# Altium PCB baicuoiki.PcbDoc (part 1 of 2)
Units mm, origin at the board's own origin, x right, y up, seen from the top; angles counter-clockwise.
Board outline 178.82 x 125.98 mm, 2 copper layers (Top Layer, Bottom Layer); 261 components, 166 nets, 718 pads, 50 vias.
Unrouted connection lines stored in the file: 3.
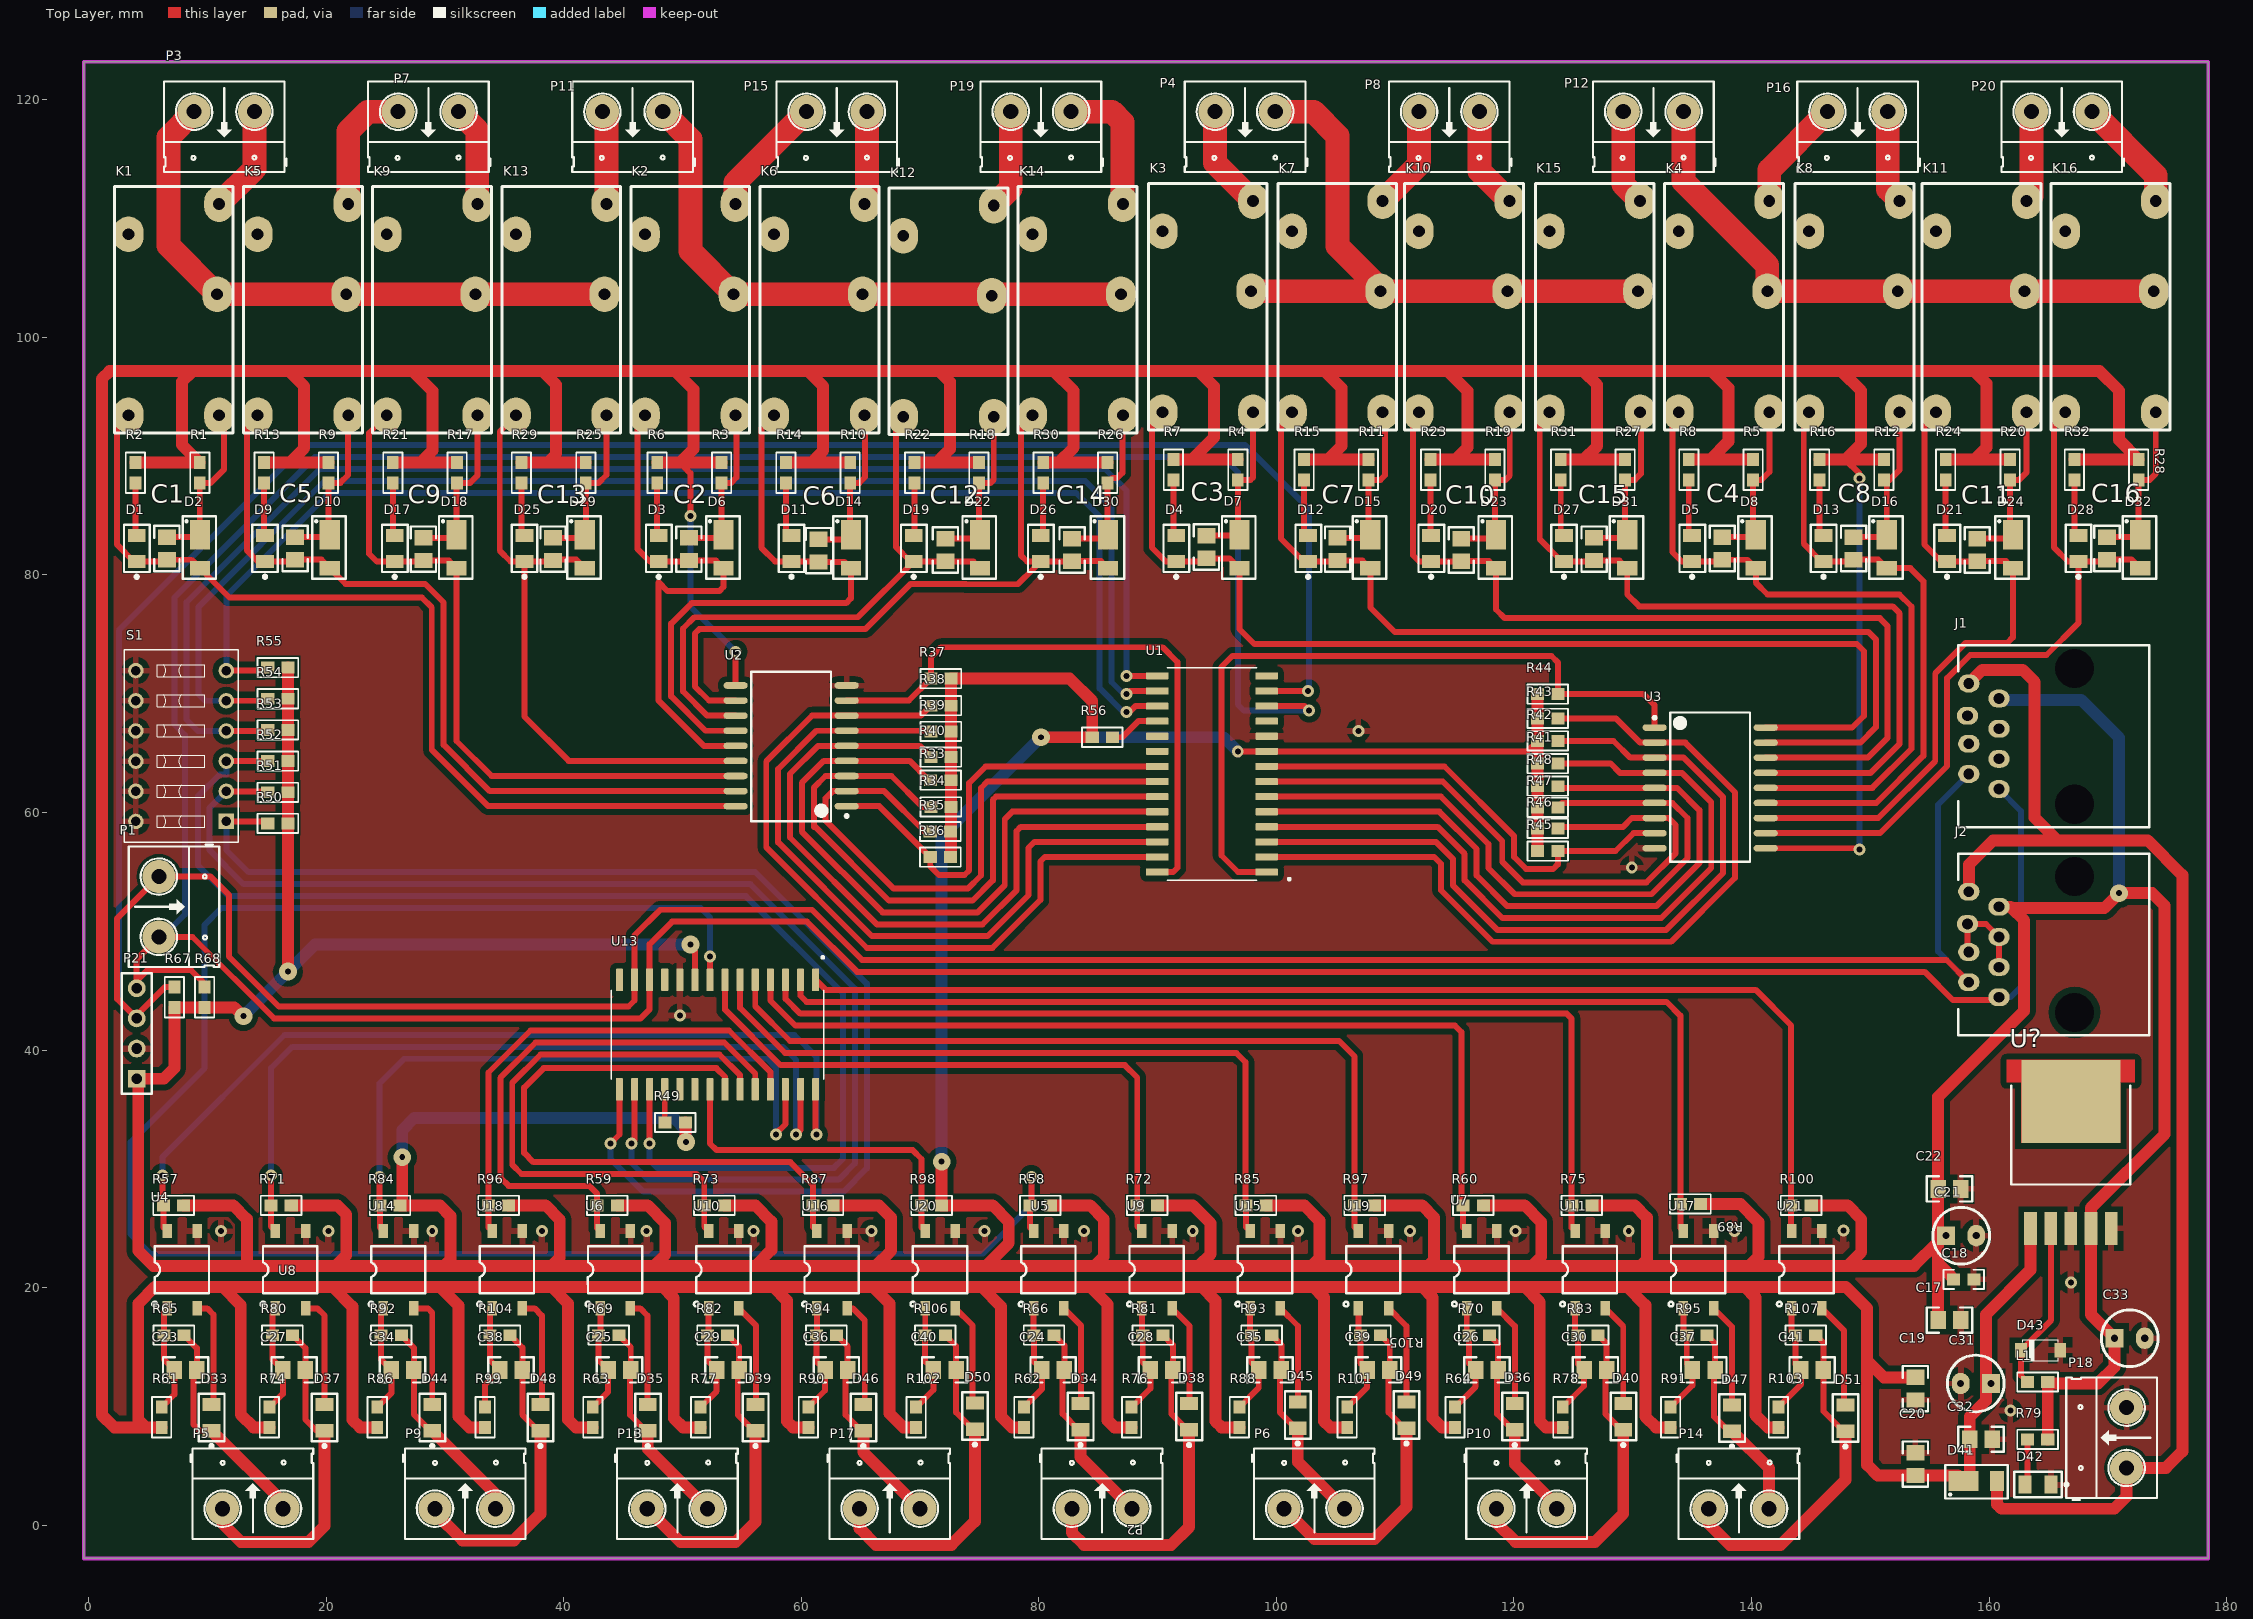
[diagram p0: Top Layer view]
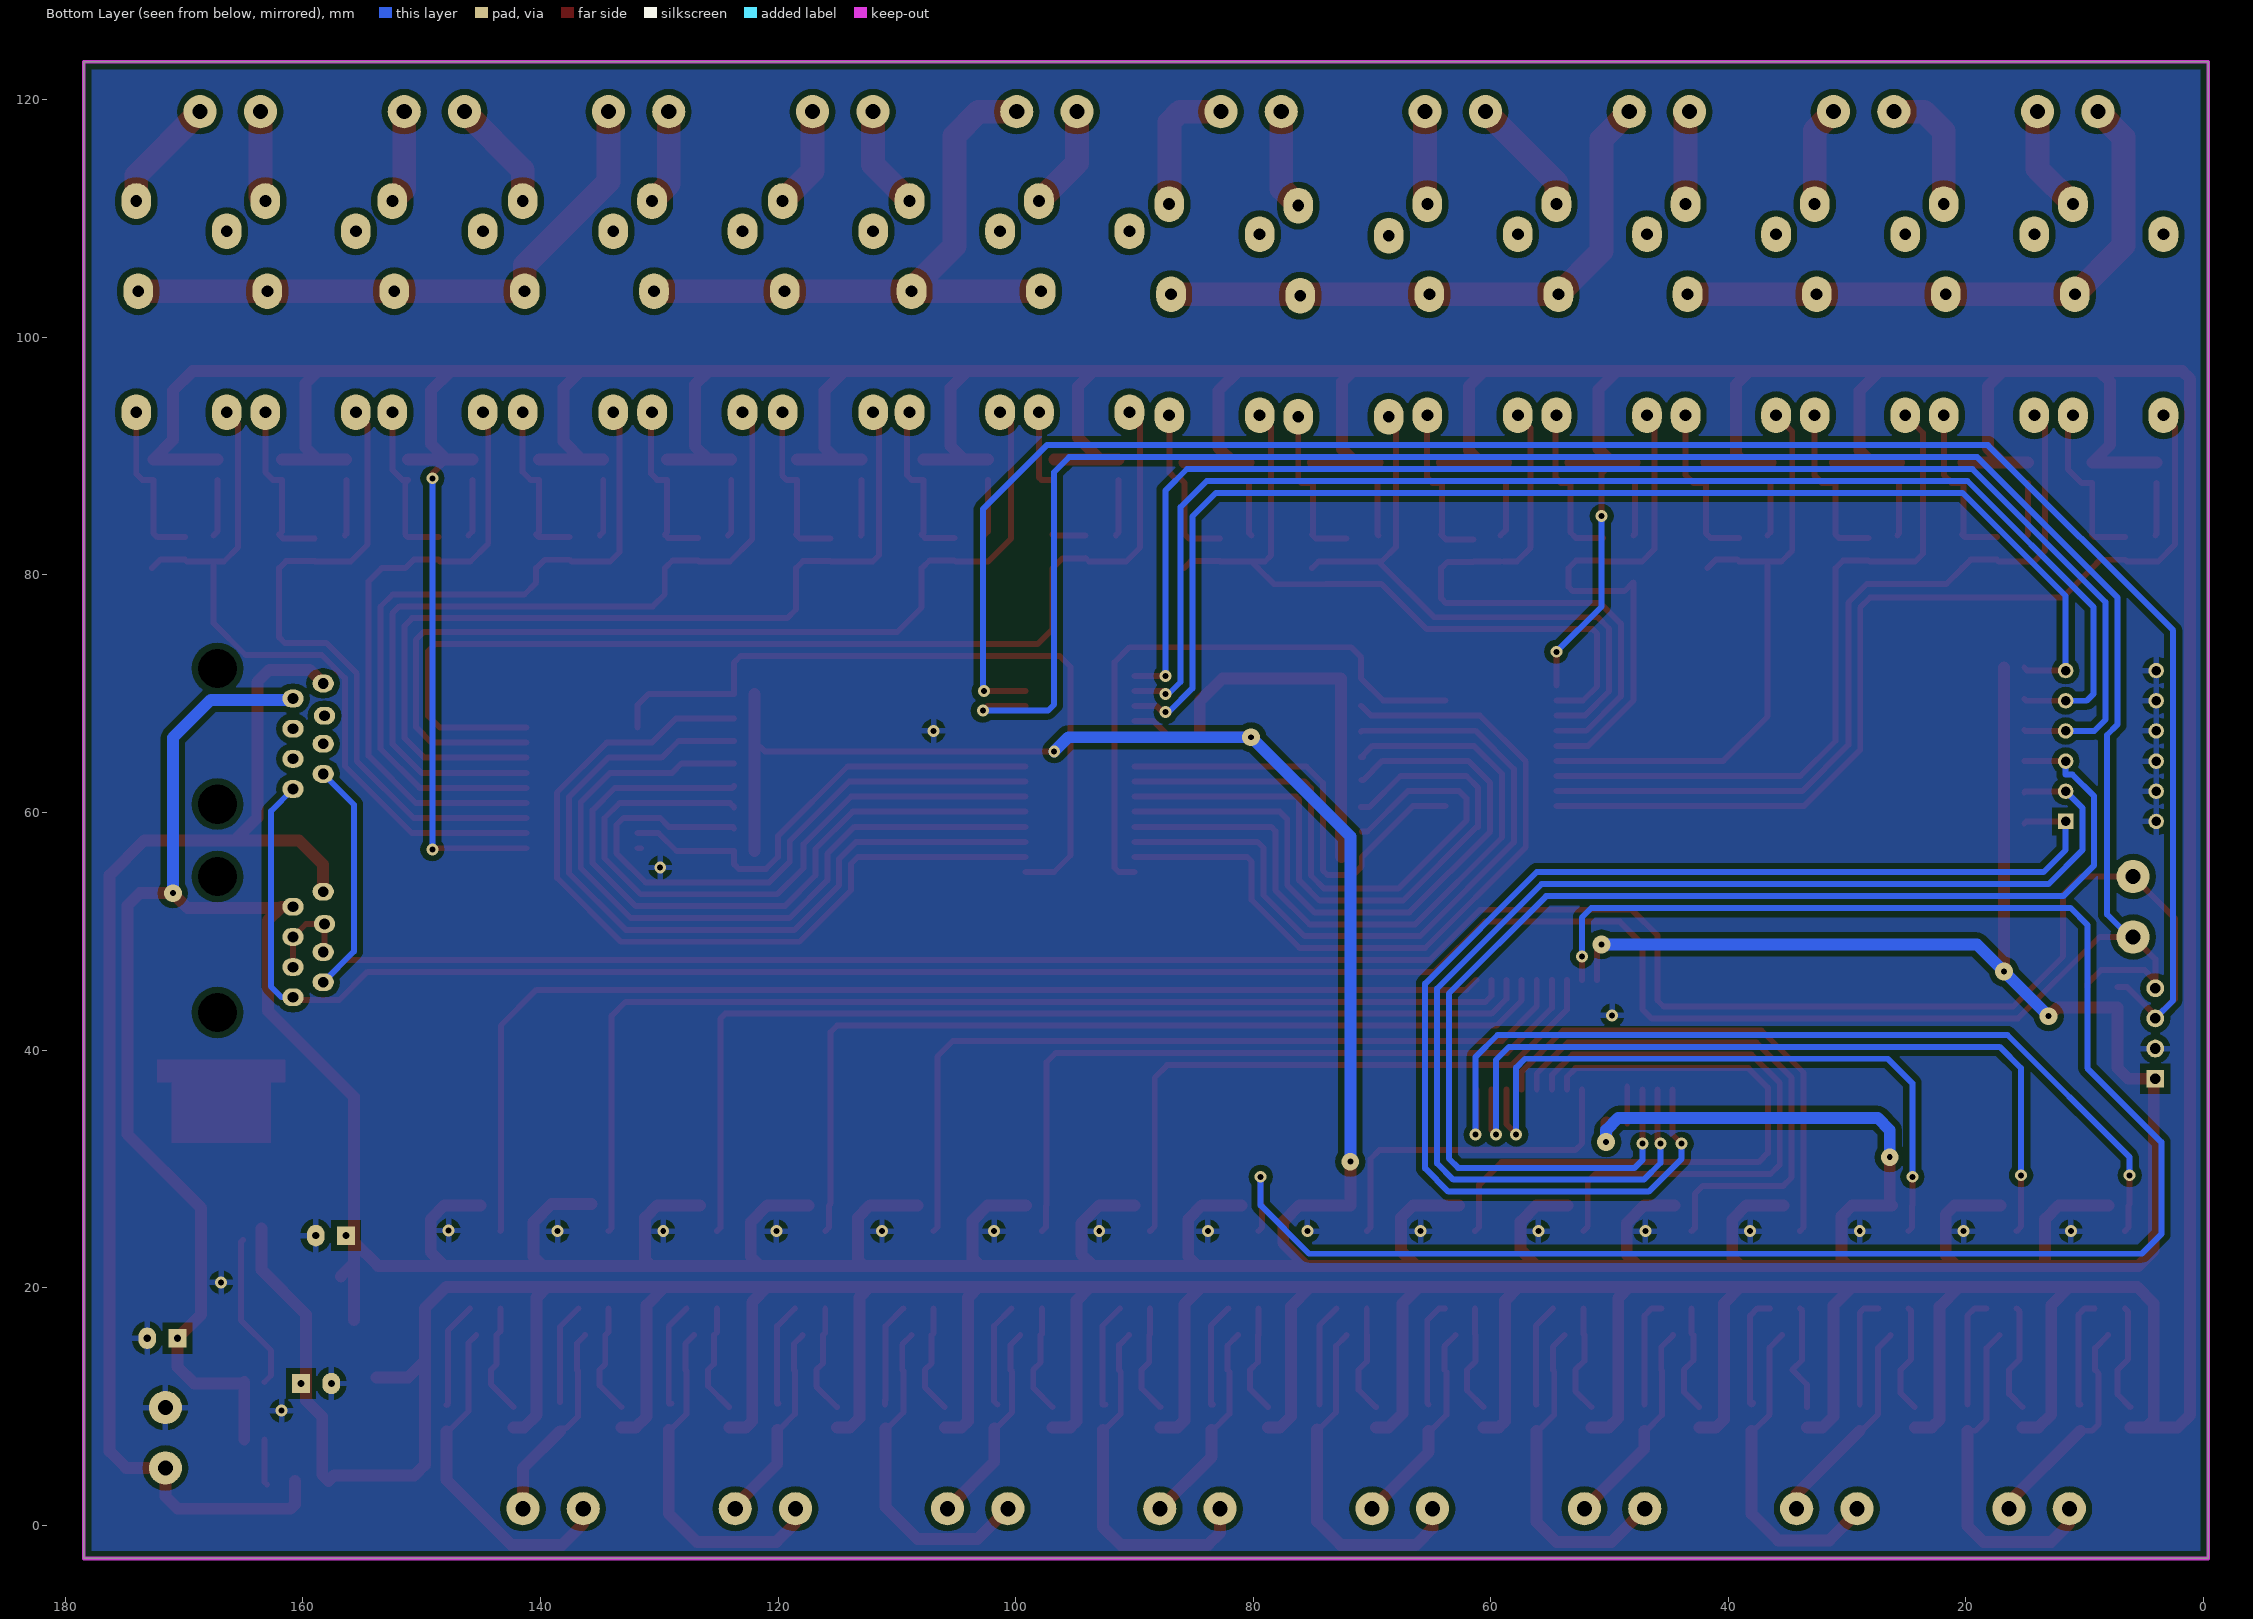
[diagram p1: Bottom Layer view, seen from below]
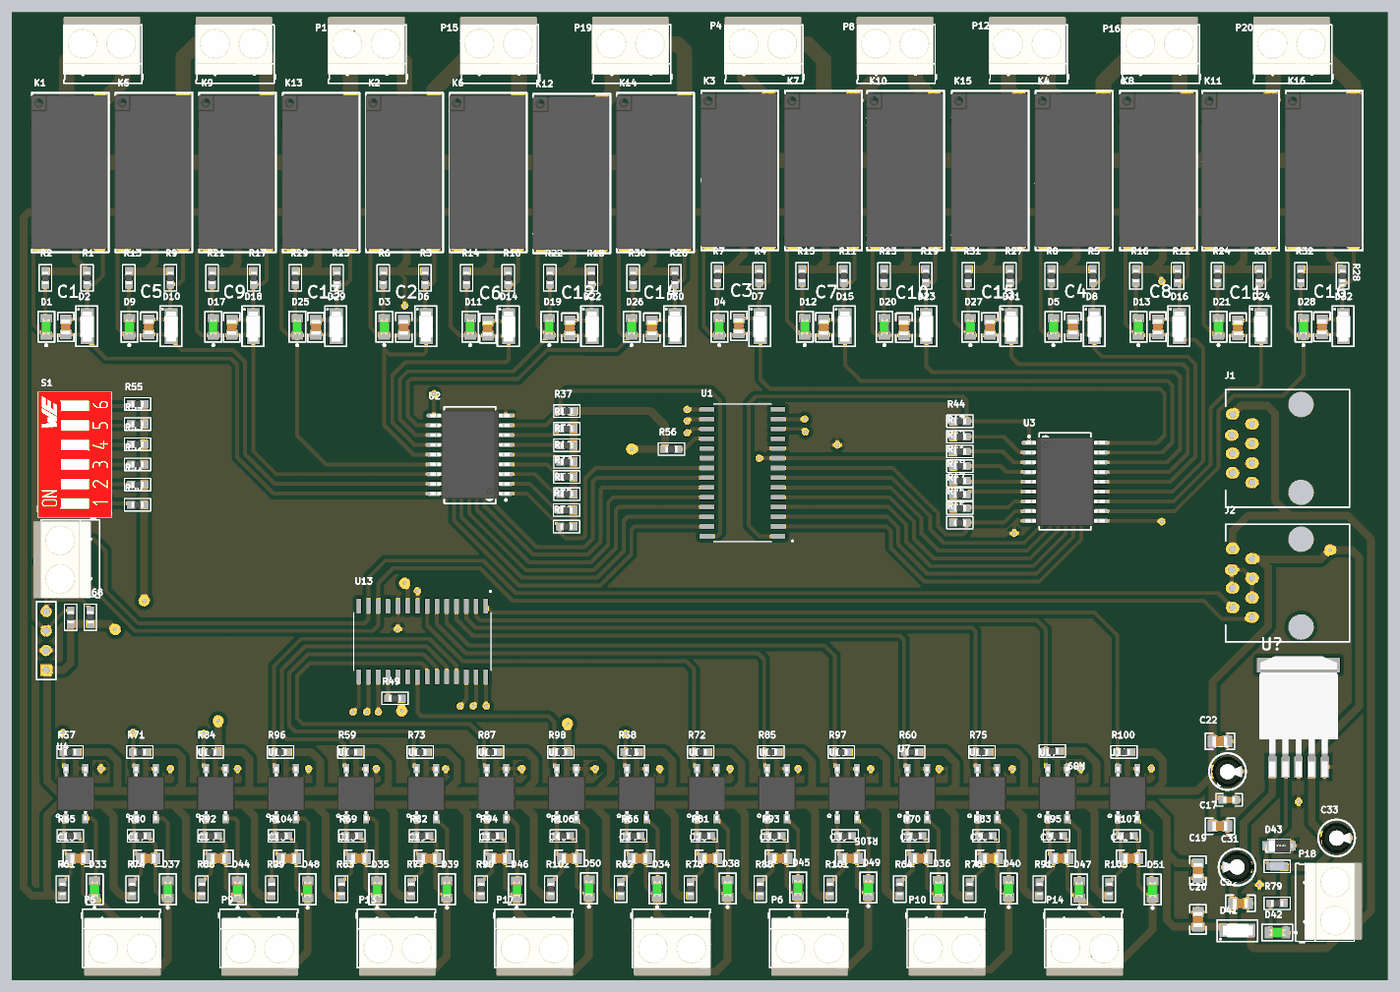
[diagram p3: 3D render of the assembled board from above, using the file's embedded part models]

## Layer stack, top to bottom
Top Solder: solder mask 0.0102, Solder Resist, Dk 3.5
Top Layer: signal copper 0.0356
Dielectric 1: dielectric 0.32, FR-4, Dk 4.8
Bottom Layer: signal copper 0.0356
Bottom Solder: solder mask 0.0102, Solder Resist, Dk 3.5

## Board outline
-0.381,-2.794 -0.381,123.19 178.435,123.19 178.435,-2.794

## Design rules (kind name [scope] priority, off if disabled: settings)
Clearance [All] p1: gap=0.5 ignorepadtopadclearanceinfootprint=FALSE
PolygonConnect [All] p1: connectstyle=Relief reliefconductorwidth=0.5 reliefentries=4 polygonreliefangle="90 Angle" airgapwidth=0.5
RoutingVias [All] p1: holewidth=0.5 width=1 viastyle="Through Hole" minholewidth=0.5 minwidth=1 maxholewidth=0.5 maxwidth=1
SolderMaskExpansion [All] p1: expansion=0.102
Width [All] p1: maxlimit=2 minlimit=0.5 preferedwidth=1
30 further rules are at their usual default settings.

## Components (designator, comment, footprint, x,y, rotation, side; value= is the part's Value field where it differs from the comment)
C1 "225/10V" "CAPC-0805 (2012)" 6.604,82.23 r90 top
C2 "225/10V" "CAPC-0805 (2012)" 50.546,82.169 r90 top
C3 "225/10V" "CAPC-0805 (2012)" 94.107,82.362 r90 top
C4 "225/10V" "CAPC-0805 (2012)" 137.541,82.23 r90 top
C5 "225/10V" "CAPC-0805 (2012)" 17.399,82.235 r90 top
C6 "225/10V" "CAPC-0805 (2012)" 61.468,82.042 r90 top
C7 "225/10V" "CAPC-0805 (2012)" 105.16,82.169 r90 top
C8 "225/10V" "CAPC-0805 (2012)" 148.59,82.235 r90 top
C9 "225/10V" "CAPC-0805 (2012)" 28.194,82.169 r90 top
C10 "225/10V" "CAPC-0805 (2012)" 115.57,82.108 r90 top
C11 "225/10V" "CAPC-0805 (2012)" 159.004,82.108 r90 top
C12 "225/10V" "CAPC-0805 (2012)" 72.136,82.108 r90 top
C13 "225/10V" "CAPC-0805 (2012)" 39.116,82.169 r90 top
C14 "225/10V" "CAPC-0805 (2012)" 82.804,82.108 r90 top
C15 "225/10V" "CAPC-0805 (2012)" 126.746,82.169 r90 top
C16 "225/10V" "CAPC-0805 (2012)" 169.926,82.235 r90 top
C17 "225/10V" "CAPC-0805 (2012)" 156.657,17.272 r0 top
C18 "Cap Pol 3mm" "CAPC-0603 (1608)" 157.861,20.701 r0 top
C19 "225/10V" "CAPC-0805 (2012)" 153.797,11.496 r270 top
C20 "225/10V" "CAPC-0805 (2012)" 153.797,5.141 r90 top
C21 "Cap Pol 3mm" C3MM 157.646,24.384 r0 top
C22 "225/10V" "CAPC-0805 (2012)" 156.657,28.321 r0 top
C23 "225/10V" "CAPC-0805 (2012)" 8.183,13.081 r180 top
C24 "225/10V" "CAPC-0805 (2012)" 81.213,13.081 r180 top
C25 "225/10V" "CAPC-0805 (2012)" 44.703,13.081 r180 top
C26 "225/10V" "CAPC-0805 (2012)" 117.723,13.081 r180 top
C27 "225/10V" "CAPC-0805 (2012)" 17.321,13.081 r180 top
C28 "225/10V" "CAPC-0805 (2012)" 90.341,13.081 r180 top
C29 "225/10V" "CAPC-0805 (2012)" 53.831,13.081 r180 top
C30 "225/10V" "CAPC-0805 (2012)" 126.851,13.081 r180 top
C31 "Cap Pol 3mm" C3MM 158.877,11.938 r180 top
C32 "225/10V" "CAPC-0805 (2012)" 159.324,7.239 r180 top
C33 "Cap Pol 3mm" C3MM 171.831,15.748 r0 top
C34 "225/10V" "CAPC-0805 (2012)" 26.448,13.081 r180 top
C35 "225/10V" "CAPC-0805 (2012)" 99.468,13.081 r180 top
C36 "225/10V" "CAPC-0805 (2012)" 62.958,13.081 r180 top
C37 "225/10V" "CAPC-0805 (2012)" 135.979,13.081 r180 top
C38 "225/10V" "CAPC-0805 (2012)" 35.576,13.081 r180 top
C39 "225/10V" "CAPC-0805 (2012)" 108.596,13.081 r180 top
C40 "225/10V" "CAPC-0805 (2012)" 72.086,13.081 r180 top
C41 "225/10V" "CAPC-0805 (2012)" 145.106,13.081 r180 top
D1 "2V4/20mA" LED_0805_GREEN 4.064,82.235 r270 top
D2 "30V/1A" DIODE_DFLS130L 9.398,81.983 r90 top
D3 "2V4/20mA" LED_0805_GREEN 48.006,82.235 r270 top
D4 "2V4/20mA" LED_0805_GREEN 91.567,82.235 r270 top
D5 "2V4/20mA" LED_0805_GREEN 135.001,82.235 r270 top
D6 "30V/1A" DIODE_DFLS130L 53.467,81.983 r90 top
D7 "30V/1A" DIODE_DFLS130L 96.901,81.983 r90 top
D8 "30V/1A" DIODE_DFLS130L 140.36,81.983 r90 top
D9 "2V4/20mA" LED_0805_GREEN 14.859,82.235 r270 top
D10 "30V/1A" DIODE_DFLS130L 20.32,81.983 r90 top
D11 "2V4/20mA" LED_0805_GREEN 59.182,82.235 r270 top
D12 "2V4/20mA" LED_0805_GREEN 102.675,82.235 r270 top
D13 "2V4/20mA" LED_0805_GREEN 146.056,82.235 r270 top
D14 "30V/1A" DIODE_DFLS130L 64.186,81.983 r90 top
D15 "30V/1A" DIODE_DFLS130L 107.908,81.983 r90 top
D16 "30V/1A" DIODE_DFLS130L 151.384,81.983 r90 top
D17 "2V4/20mA" LED_0805_GREEN 25.781,82.235 r270 top
D18 "30V/1A" DIODE_DFLS130L 30.988,81.983 r90 top
D19 "2V4/20mA" LED_0805_GREEN 69.469,82.235 r270 top
D20 "2V4/20mA" LED_0805_GREEN 113.03,82.235 r270 top
D21 "2V4/20mA" LED_0805_GREEN 156.464,82.235 r270 top
D22 "30V/1A" DIODE_DFLS130L 75.057,81.983 r90 top
D23 "30V/1A" DIODE_DFLS130L 118.491,81.983 r90 top
D24 "30V/1A" DIODE_DFLS130L 162.001,81.983 r90 top
D25 "2V4/20mA" LED_0805_GREEN 36.703,82.235 r270 top
D26 "2V4/20mA" LED_0805_GREEN 80.162,82.235 r270 top
D27 "2V4/20mA" LED_0805_GREEN 124.206,82.235 r270 top
D28 "2V4/20mA" LED_0805_GREEN 167.513,82.235 r270 top
D29 "30V/1A" DIODE_DFLS130L 41.783,81.983 r90 top
D30 "30V/1A" DIODE_DFLS130L 85.834,81.983 r90 top
D31 "30V/1A" DIODE_DFLS130L 129.54,81.983 r90 top
D32 "30V/1A" DIODE_DFLS130L 172.72,81.983 r90 top
D33 "2V4/20mA" LED_0805_GREEN 10.359,9.06 r270 top
D34 "2V4/20mA" LED_0805_GREEN 83.511,9.144 r270 top
D35 "2V4/20mA" LED_0805_GREEN 47.086,9.06 r270 top
D36 "2V4/20mA" LED_0805_GREEN 120.073,9.144 r270 top
D37 "2V4/20mA" LED_0805_GREEN 19.869,9.06 r270 top
D38 "2V4/20mA" LED_0805_GREEN 92.655,9.144 r270 top
D39 "2V4/20mA" LED_0805_GREEN 56.159,9.06 r270 top
D40 "2V4/20mA" LED_0805_GREEN 129.201,9.144 r270 top
D41 "30V/1A" DIODE_DFLS130L 159.258,3.734 r180 top
D42 "2V4/20mA" LED_0805_GREEN 164.127,3.429 r0 top
D43 "3.6V" SOD-123 164.337,14.732 r90 top
D44 "2V4/20mA" LED_0805_GREEN 28.941,9.06 r270 top
D45 "2V4/20mA" LED_0805_GREEN 101.799,9.271 r270 top
D46 "2V4/20mA" LED_0805_GREEN 65.231,9.06 r270 top
D47 "2V4/20mA" LED_0805_GREEN 138.355,9.017 r270 top
D48 "2V4/20mA" LED_0805_GREEN 38.045,9.06 r270 top
D49 "2V4/20mA" LED_0805_GREEN 110.946,9.271 r270 top
D50 "2V4/20mA" LED_0805_GREEN 74.621,9.187 r270 top
D51 "2V4/20mA" LED_0805_GREEN 147.9,9.017 r270 top
J1 "RJ45-5524-8C" RJ45_5224-8C 162.687,66.421 r90 top
J2 "RJ45-5524-8C" RJ45_5224-8C 162.687,48.895 r90 top
K1 "RELAY" RELAY 3.38,93.441 r0 top
K2 "RELAY" RELAY 46.854,93.441 r0 top
K3 "RELAY" RELAY 90.422,93.695 r0 top
K4 "RELAY" RELAY 133.877,93.695 r0 top
K5 "RELAY" RELAY 14.249,93.441 r0 top
K6 "RELAY" RELAY 57.723,93.441 r0 top
K7 "RELAY" RELAY 101.31,93.695 r0 top
K8 "RELAY" RELAY 144.852,93.695 r0 top
K9 "RELAY" RELAY 25.117,93.441 r0 top
K10 "RELAY" RELAY 111.992,93.695 r0 top
K11 "RELAY" RELAY 155.54,93.695 r0 top
K12 "RELAY" RELAY 68.592,93.314 r0 top
K13 "RELAY" RELAY 35.986,93.441 r0 top
K14 "RELAY" RELAY 79.46,93.441 r0 top
K15 "RELAY" RELAY 122.988,93.695 r0 top
K16 "RELAY" RELAY 166.409,93.695 r0 top
L1 "47nH/0.3A" "IND-0603 (1608)" 164.084,12.065 r0 top
P1 "Header 2x1" HED2 5.93,54.61 r270 top
P2 "Header 2x1" HED2 82.786,1.397 r0 top
P3 "Header 2x1" HED2 13.97,118.999 r180 top
P4 "Header 2x1" HED2 99.907,118.999 r180 top
P5 "Header 2x1" HED2 11.303,1.397 r0 top
P6 "Header 2x1" HED2 100.657,1.397 r0 top
P7 "Header 2x1" HED2 31.157,118.999 r180 top
P8 "Header 2x1" HED2 117.094,118.999 r180 top
P9 "Header 2x1" HED2 29.174,1.397 r0 top
P10 "Header 2x1" HED2 118.527,1.397 r0 top
P11 "Header 2x1" HED2 48.345,118.999 r180 top
P12 "Header 2x1" HED2 134.281,118.999 r180 top
P13 "Header 2x1" HED2 47.044,1.397 r0 top
P14 "Header 2x1" HED2 136.398,1.397 r0 top
P15 "Header 2x1" HED2 65.532,118.999 r180 top
P16 "Header 2x1" HED2 151.469,118.999 r180 top
P17 "Header 2x1" HED2 64.915,1.397 r0 top
P18 "Header 2x1" HED2 171.577,4.826 r90 top
P19 "Header 2x1" HED2 82.719,118.999 r180 top
P20 "Header 2x1" HED2 168.656,118.999 r180 top
P21 "Header 4P" HDR1X4 4.064,37.592 r90 top
R1 "10k" "RESC-0603 (1608)" 9.373,88.607 r90 top value=13K
R2 "10k" "RESC-0603 (1608)" 3.957,88.607 r90 top value=13K
R3 "10k" "RESC-0603 (1608)" 53.295,88.607 r90 top value=13K
R4 "10k" "RESC-0603 (1608)" 96.754,88.861 r90 top value=13K
R5 "10k" "RESC-0603 (1608)" 140.134,88.861 r90 top value=13K
R6 "10k" "RESC-0603 (1608)" 47.879,88.607 r90 top value=13K
R7 "10k" "RESC-0603 (1608)" 91.338,88.861 r90 top value=13K
R8 "10k" "RESC-0603 (1608)" 134.718,88.861 r90 top value=13K
R9 "10k" "RESC-0603 (1608)" 20.205,88.607 r90 top value=13K
R10 "10k" "RESC-0603 (1608)" 64.127,88.607 r90 top value=13K
R11 "10k" "RESC-0603 (1608)" 107.751,88.861 r90 top value=13K
R12 "10k" "RESC-0603 (1608)" 151.146,88.861 r90 top value=13K
R13 "10k" "RESC-0603 (1608)" 14.789,88.607 r90 top value=13K
R14 "10k" "RESC-0603 (1608)" 58.711,88.607 r90 top value=13K
R15 "10k" "RESC-0603 (1608)" 102.335,88.861 r90 top value=13K
R16 "10k" "RESC-0603 (1608)" 145.73,88.861 r90 top value=13K
R17 "10k" "RESC-0603 (1608)" 31.037,88.607 r90 top value=13K
R18 "10k" "RESC-0603 (1608)" 74.959,88.607 r90 top value=13K
R19 "10k" "RESC-0603 (1608)" 118.397,88.861 r90 top value=13K
R20 "10k" "RESC-0603 (1608)" 161.761,88.861 r90 top value=13K
R21 "10k" "RESC-0603 (1608)" 25.621,88.607 r90 top value=13K
R22 "10k" "RESC-0603 (1608)" 69.543,88.607 r90 top value=13K
R23 "10k" "RESC-0603 (1608)" 112.981,88.861 r90 top value=13K
R24 "10k" "RESC-0603 (1608)" 156.345,88.861 r90 top value=13K
R25 "10k" "RESC-0603 (1608)" 41.869,88.607 r90 top value=13K
R26 "10k" "RESC-0603 (1608)" 85.791,88.607 r90 top value=13K
R27 "10k" "RESC-0603 (1608)" 129.356,88.861 r90 top value=13K
R28 "10k" "RESC-0603 (1608)" 172.593,88.861 r90 top value=13K
R29 "10k" "RESC-0603 (1608)" 36.453,88.607 r90 top value=13K
R30 "10k" "RESC-0603 (1608)" 80.375,88.607 r90 top value=13K
R31 "10k" "RESC-0603 (1608)" 123.94,88.861 r90 top value=13K
R32 "10k" "RESC-0603 (1608)" 167.177,88.861 r90 top value=13K
R33 "10k" "RESC-0603 (1608)" 71.749,62.722 r180 top value=13K
R34 "10k" "RESC-0603 (1608)" 71.761,60.483 r180 top value=13K
R35 "10k" "RESC-0603 (1608)" 71.714,58.404 r180 top value=13K
R36 "10k" "RESC-0603 (1608)" 71.714,56.245 r180 top value=13K
R37 "10k" "RESC-0603 (1608)" 71.761,71.278 r180 top value=13K
R38 "10k" "RESC-0603 (1608)" 71.761,68.992 r180 top value=13K
R39 "10k" "RESC-0603 (1608)" 71.761,66.833 r180 top value=13K
R40 "10k" "RESC-0603 (1608)" 71.761,64.674 r180 top value=13K
R41 "10k" "RESC-0603 (1608)" 122.846,64.123 r0 top value=13K
R42 "10k" "RESC-0603 (1608)" 122.846,66.028 r0 top value=13K
R43 "10k" "RESC-0603 (1608)" 122.846,67.933 r0 top value=13K
R44 "10k" "RESC-0603 (1608)" 122.846,69.965 r0 top value=13K
R45 "10k" "RESC-0603 (1608)" 122.846,56.757 r0 top value=13K
R46 "10k" "RESC-0603 (1608)" 122.846,58.662 r0 top value=13K
R47 "10k" "RESC-0603 (1608)" 122.846,60.44 r0 top value=13K
R48 "10k" "RESC-0603 (1608)" 122.846,62.218 r0 top value=13K
R49 "10k" "RESC-0603 (1608)" 49.403,33.909 r180 top value=13K
R50 "10k" "RESC-0603 (1608)" 15.948,59.081 r180 top value=13K
R51 "10k" "RESC-0603 (1608)" 15.948,61.706 r180 top value=13K
R52 "10k" "RESC-0603 (1608)" 15.948,64.33 r180 top value=13K
R53 "10k" "RESC-0603 (1608)" 15.948,66.955 r180 top value=13K
R54 "10k" "RESC-0603 (1608)" 15.948,69.58 r180 top value=13K
R55 "10k" "RESC-0603 (1608)" 15.948,72.204 r180 top value=13K
R56 "10k" "RESC-0603 (1608)" 85.35,66.338 r0 top value=13K
R57 "4.7K" "RESC-0603 (1608)" 7.168,26.924 r180 top value=13K
R58 "4.7K" "RESC-0603 (1608)" 80.121,26.924 r180 top value=13K
R59 "4.7K" "RESC-0603 (1608)" 43.672,26.924 r180 top value=13K
R60 "4.7K" "RESC-0603 (1608)" 116.57,26.924 r180 top value=13K
R61 "2.2k" "RESC-0603 (1608)" 6.168,9.092 r270 top value=13K
R62 "2.2k" "RESC-0603 (1608)" 78.748,9.092 r270 top value=13K
R63 "2.2k" "RESC-0603 (1608)" 42.458,9.092 r270 top value=13K
R64 "2.2k" "RESC-0603 (1608)" 115.038,9.092 r270 top value=13K
R65 "10k" "RESC-0603 (1608)" 7.196,16.002 r0 top value=13K
R66 "10k" "RESC-0603 (1608)" 80.443,16.002 r0 top value=13K
R67 "1k" "RESC-0603 (1608)" 7.239,44.45 r90 top value=13K
R68 "1k" "RESC-0603 (1608)" 9.779,44.45 r90 top value=13K
R69 "10k" "RESC-0603 (1608)" 43.806,16.002 r0 top value=13K
R70 "10k" "RESC-0603 (1608)" 117.081,16.002 r0 top value=13K
R71 "4.7K" "RESC-0603 (1608)" 16.222,26.924 r180 top value=13K
R72 "4.7K" "RESC-0603 (1608)" 89.138,26.924 r180 top value=13K
R73 "4.7K" "RESC-0603 (1608)" 52.689,26.924 r180 top value=13K
R74 "2.2k" "RESC-0603 (1608)" 15.241,9.092 r270 top value=13K
R75 "4.7K" "RESC-0603 (1608)" 125.714,26.924 r180 top value=13K
R76 "2.2k" "RESC-0603 (1608)" 87.821,9.092 r270 top value=13K
R77 "2.2k" "RESC-0603 (1608)" 51.531,9.092 r270 top value=13K
R78 "2.2k" "RESC-0603 (1608)" 124.111,9.092 r270 top value=13K
R79 "2.2K" "RESC-0603 (1608)" 164.084,7.239 r0 top value=13K
R80 "10k" "RESC-0603 (1608)" 16.327,16.002 r0 top value=13K
R81 "10k" "RESC-0603 (1608)" 89.603,16.002 r0 top value=13K
R82 "10k" "RESC-0603 (1608)" 52.965,16.002 r0 top value=13K
R83 "10k" "RESC-0603 (1608)" 126.24,16.002 r0 top value=13K
R84 "4.7K" "RESC-0603 (1608)" 25.384,26.924 r180 top value=13K
R85 "4.7K" "RESC-0603 (1608)" 98.282,26.924 r180 top value=13K
R86 "2.2k" "RESC-0603 (1608)" 24.313,9.092 r270 top value=13K
R87 "4.7K" "RESC-0603 (1608)" 61.833,26.924 r180 top value=13K
R88 "2.2k" "RESC-0603 (1608)" 96.893,9.092 r270 top value=13K
R89 "4.7K" "RESC-0603 (1608)" 134.858,27.051 r180 top value=13K
R90 "2.2k" "RESC-0603 (1608)" 60.603,9.092 r270 top value=13K
R91 "2.2k" "RESC-0603 (1608)" 133.183,9.092 r270 top value=13K
R92 "10k" "RESC-0603 (1608)" 25.487,16.002 r0 top value=13K
R93 "10k" "RESC-0603 (1608)" 98.762,16.002 r0 top value=13K
R94 "10k" "RESC-0603 (1608)" 62.124,16.002 r0 top value=13K
R95 "10k" "RESC-0603 (1608)" 135.4,16.002 r0 top value=13K
R96 "4.7K" "RESC-0603 (1608)" 34.528,26.924 r180 top value=13K
R97 "4.7K" "RESC-0603 (1608)" 107.426,26.924 r180 top value=13K
R98 "4.7K" "RESC-0603 (1608)" 70.977,26.924 r180 top value=13K
R99 "2.2k" "RESC-0603 (1608)" 33.386,9.092 r270 top value=13K
R100 "4.7K" "RESC-0603 (1608)" 144.178,26.924 r180 top value=13K
R101 "2.2k" "RESC-0603 (1608)" 105.966,9.092 r270 top value=13K
R102 "2.2k" "RESC-0603 (1608)" 69.676,9.092 r270 top value=13K
R103 "2.2k" "RESC-0603 (1608)" 142.256,9.092 r270 top value=13K
R104 "10k" "RESC-0603 (1608)" 34.646,16.002 r0 top value=13K
R105 "10k" "RESC-0603 (1608)" 107.921,16.002 r0 top value=13K
R106 "10k" "RESC-0603 (1608)" 71.284,16.002 r0 top value=13K
R107 "10k" "RESC-0603 (1608)" 144.559,16.002 r0 top value=13K
S1 "=partNo" SW-DIP6 7.798,65.6 r90 top
U1 "MCP23017-E/SO" SOIC127P1030X265-28N 94.582,63.246 r180 top
U2 "ULN2803A" SO18 59.156,65.616 r180 top
U3 "ULN2803A" SO18 136.52,62.076 r0 top
U4 "VOM617A-2T" "OPTO TRANSISTOR_SOP-4" 7.893,21.518 r90 top
U5 "VOM617A-2T" "OPTO TRANSISTOR_SOP-4" 80.83,21.518 r90 top
U6 "VOM617A-2T" "OPTO TRANSISTOR_SOP-4" 44.361,21.518 r90 top
U7 "VOM617A-2T" "OPTO TRANSISTOR_SOP-4" 117.298,21.518 r90 top
U8 "VOM617A-2T" "OPTO TRANSISTOR_SOP-4" 17.01,21.518 r90 top
U9 "VOM617A-2T" "OPTO TRANSISTOR_SOP-4" 89.947,21.518 r90 top
U10 "VOM617A-2T" "OPTO TRANSISTOR_SOP-4" 53.478,21.518 r90 top
U11 "VOM617A-2T" "OPTO TRANSISTOR_SOP-4" 126.415,21.518 r90 top
U13 "MCP23017-E/SO" SOIC127P1030X265-28N 52.959,41.308 r270 top
U14 "VOM617A-2T" "OPTO TRANSISTOR_SOP-4" 26.109,21.518 r90 top
U15 "VOM617A-2T" "OPTO TRANSISTOR_SOP-4" 99.064,21.518 r90 top
U16 "VOM617A-2T" "OPTO TRANSISTOR_SOP-4" 62.595,21.518 r90 top
U17 "VOM617A-2T" "OPTO TRANSISTOR_SOP-4" 135.532,21.518 r90 top
U18 "VOM617A-2T" "OPTO TRANSISTOR_SOP-4" 35.244,21.518 r90 top
U19 "VOM617A-2T" "OPTO TRANSISTOR_SOP-4" 108.181,21.518 r90 top
U20 "VOM617A-2T" "OPTO TRANSISTOR_SOP-4" 71.713,21.518 r90 top
U21 "VOM617A-2T" "OPTO TRANSISTOR_SOP-4" 144.649,21.518 r90 top
U? "LM2596S-ADJ" TO263-5 166.878,24.987 r0 top

## Footprints (in the part's own frame and the unit in brackets; to place one, negate y for a bottom-side part, rotate by r counter-clockwise, add the part's x,y. Pads: shape width x height; smd on the part's side, far side on the other; paste and mask are expansions set on the pad)
C3MM [mm]
  rect 1.5x1.58 hole 0.6: 1(-1.27,0)
  oval 1.5x1.8 hole 0.6: 2(1.27,0)
  silkscreen extent -2.39,-2.39 2.39,2.39, body extent -2,-2.03 1.99,1.97, height 7.01
"CAPC-0603 (1608)" [mm] "Resistor, Chip; 1.60 mm L X 0.80 mm W X 0.50 mm H body"
  rect 1.1x1 smd mask+0.1: 1(-0.85,0) 2(0.85,0)
  silkscreen extent -1.71,-0.81 1.71,0.81, body extent -0.8,-0.4 0.8,0.4, height 0.6
"CAPC-0805 (2012)" [mm] "Resistor, Chip; 2.00 mm L X 1.25 mm W X 0.70 mm H body"
  rect 1.3x1.5 smd: 1(-0.95,0) 2(0.95,0)
  silkscreen extent -1.91,-1.06 1.91,1.06, body extent -1,-0.62 1,0.63, height 0.7
DIODE_DFLS130L [mm] "DIODE_DFLS130L"
  rect 1.2x1.7 smd paste+0: 1(-1.415,0)
  rect 2.5x1.7 smd: 2(1.415,0)
  silkscreen extent -2.3,-1.35 2.96,1.47, body extent -1.66,-0.87 2.24,0.91, height 1.15
HDR1X4 [mm] "Connector; Header; 4 Position"
  rect 1.5x1.5 hole 0.9: 1(0,0)
  round 1.5 hole 0.9: 2(2.54,0) 3(5.08,0) 4(7.62,0)
  silkscreen extent -1.27,-1.27 8.89,1.27, body extent -1.27,-1.27 8.89,1.27, height 7
HED2 [mil] "Header 2, 2 pin, hight 300mil, Pin to Pin 200, Colour Green"
  round 110 hole 50: 1(0,0) 2(200,0)
  silkscreen extent -106,-100 300,200, body extent -92,-140 302,155, height 394
"IND-0603 (1608)" [mm] "Resistor, Chip; 1.60 mm L X 0.80 mm W X 0.50 mm H body"
  rect 1.1x1 smd mask+0.1: 1(-0.85,0) 2(0.85,0)
  silkscreen extent -1.71,-0.81 1.71,0.81, body extent -0.92,-0.56 0.92,0.56, height 0.9
LED_0805_GREEN [mm] "LED SMD; Body 2.0 x 1.3 mm (LxW typ)"
  rect 1.1x1.5 smd: 1(-1.1,0) 2(1.1,0)
  silkscreen extent -2.01,-1.07 2.52,1.09, body extent -1.01,-0.63 1.01,0.62, height 1.1
"OPTO TRANSISTOR_SOP-4" [mm]
  rect 1.2x0.8 smd: 1(-3.25,1.27) 2(-3.25,-1.27) 3(3.25,-1.27) 4(3.25,1.27)
  silkscreen extent -3.1,-2.26 1.97,2.51, body extent -3.48,-2.46 3.47,2.46, height 2.17
RELAY [mm]
  oval 2.5x3 hole 1: 1(0,0) 2(0,15.24) 3(7.62,17.78) 4(7.454,10.191) 5(7.62,0)
  silkscreen extent -1.19,-1.5 8.81,19.25, body extent -1.31,-1.07 8.69,18.93, height 15.6
"RESC-0603 (1608)" [mm] "Resistor, Chip; 1.60 mm L X 0.80 mm W X 0.50 mm H body"
  rect 1.1x1 smd mask+0.1: 1(-0.85,0) 2(0.85,0)
  silkscreen extent -1.71,-0.81 1.71,0.81, body extent -0.8,-0.4 0.8,0.4, height 0.5
RJ45_5224-8C [mm]
  round 1 hole 3.3: 0(-5.715,-4.505) 0(5.715,-4.505)
  oval 1.5x1.8 hole 0.9: 1(-4.445,1.855) 2(-3.175,4.395) 3(-1.905,1.855) 4(-0.635,4.395) 5(0.635,1.855) 6(1.725,4.505) 7(3.175,1.855) 8(4.445,4.395)
  silkscreen extent -7.65,-10.8 7.65,5.3, body extent -7.65,-10.8 7.65,5.3, height 16.1
SO18 [mm] "SOIC, 18-Leads, Body 11.50x7.50mm, Pitch 1.27mm, IPC Medium Density"
  oval 2.032x0.55 smd: 1(-4.675,5.08) 2(-4.675,3.81) 3(-4.675,2.54) 4(-4.675,1.27) 5(-4.675,0) 6(-4.675,-1.27) 7(-4.675,-2.54) 8(-4.675,-3.81) 9(-4.675,-5.08) 10(4.675,-5.08) 11(4.675,-3.81) 12(4.675,-2.54) 13(4.675,-1.27) 14(4.675,0) 15(4.675,1.27) 16(4.675,2.54) 17(4.675,3.81) 18(4.675,5.08)
  silkscreen extent -4.8,-6.22 3.35,6.35, body extent -5.15,-5.77 5.15,5.76, height 2.7
SOD-123 [mm] "SOD123, 2-Leads, Body 2.6x1.6mm, Pitch 3.05mm, IPC High Density"
  rect 1.2x1 smd: 1(0,-1.652) 2(0,1.652)
  silkscreen extent -0.9,-1.5 0.9,1.5, body extent -0.8,-1.85 0.8,1.85, height 1.27
SOIC127P1030X265-28N [mm]
  rrect25% 1.9x0.6 smd: 1(-4.605,8.255) 2(-4.605,6.985) 3(-4.605,5.715) 4(-4.605,4.445) 5(-4.605,3.175) 6(-4.605,1.905) 7(-4.605,0.635) 8(-4.605,-0.635) 9(-4.605,-1.905) 10(-4.605,-3.175) 11(-4.605,-4.445) 12(-4.605,-5.715) 13(-4.605,-6.985) 14(-4.605,-8.255) 15(4.605,-8.255) 16(4.605,-6.985) 17(4.605,-5.715) 18(4.605,-4.445) 19(4.605,-3.175) 20(4.605,-1.905) 21(4.605,-0.635) 22(4.605,0.635) 23(4.605,1.905) 24(4.605,3.175) 25(4.605,4.445) 26(4.605,5.715) 27(4.605,6.985) 28(4.605,8.255)
  silkscreen extent -6.61,-8.95 3.75,8.95
SW-DIP6 [mm] "06p, 2.54mm Pitch, Horizontal, Box Type, THT, flat Actuator, red, without Tape, Tube"
  rect 1.3x1.3 hole 0.8: 1(-6.35,-3.81)
  round 1.3 hole 0.8: 2(-3.81,-3.81) 3(-1.27,-3.81) 4(1.27,-3.81) 5(3.81,-3.81) 6(6.35,-3.81) 7(6.35,3.81) 8(3.81,3.81) 9(1.27,3.81) 10(-1.27,3.81) 11(-3.81,3.81) 12(-6.35,3.81)
  silkscreen extent -8.12,-4.8 8.12,4.8, body extent -8.12,-4.8 8.12,4.8, height 5.4
TO263-5 [mm] "LM2576-SMD"
  rect 1.07x2.75 smd: 1(-3.4,0) 2(-1.7,0) 3(0,0) 4(1.7,0) 5(3.4,0)
  rect 8.33x6.99 smd: 6(0,10.7)
  Top Layer region: -5.4,14.195 -5.4,12.295 -4.165,12.295 -4.165,7.205 4.165,7.205 4.165,12.295 5.4,12.295 5.4,14.195
  silkscreen extent -5,3.7 5,12, body extent -5,-1.29 5,14.38, height 4.79

## Part data
C1 C2 C3 C4 C5 C6 C7 C8 C9 C10 C11 C12 C13 C14 C15 C16 C17 C19 C20 C22 C23 C24 C25 C26 C27 C28 C29 C30 C32 C34 C35 C36 C37 C38 C39 C40 C41: library part 0805C225K8PAC7800, "CAP CER 2.2uF 10% 10V X5R 0805", Category=CAPACITOR, CompanyID=VT-00292, MPN=0805C225K8PAC7800, PinCount=2, Solder=SMT
C18 C21 C31 C33: "Polarized Capacitor (Axial)", =1uF, LatestRevisionDate=17-Jul-2002, LatestRevisionNote="Re-released for DXP Platform.", PackageReference=POLAR0.8, Published=8-Jun-2000, Publisher="Altium Limited"
D1 D3 D4 D5 D9 D11 D12 D13 D17 D19 D20 D21 D25 D26 D27 D28 D33 D34 D35 D36 D37 D38 D39 D40 D42 D44 D45 D46 D47 D48 D49 D50 D51: library part 17-21/G6C-FM1N2B/3T, "LED GREEN CLEAR 2V4 20mA 0805 SMD", CompanyID=VT-00393, MPN=17-21/G6C-FM1N2B/3T, Solder=SMT
D2 D6 D7 D8 D10 D14 D15 D16 D18 D22 D23 D24 D29 D30 D31 D32 D41: library part DFLS130L-7, "DIODE SCHOTTKY 30V 1A POWERDI123", CompanyID=VT-00057, MPN=DFLS130L-7, Solder=SMT
D43: library part MMSZ3V6T1G, "DIODE ZENER 3.6V 500MW SOD123", MFR=ON, MPN=MMSZ3V6T1G, Solder=SMT
J1 J2: library part RJ45_5224-8C, "RJ45-12P", MFR_URL=https://vi.aliexpress.com/item/80PCS-x-RJ45-5224-8C-Plastic-PCB-Modular-jack-Network-socket-LAN-CONNECTOR-plug-180degree-top/32722417191.html, Solder=WAVE
L1: library part AIMC-0603-47NJ-T, "IND-FIXED 47nH 300mA 700 mOhm 0603", Category=INDUCTOR, CompanyID=VT-01094, MPN=AIMC-0603-47NJ-T, Solder=SMT
P1 P2 P3 P4 P5 P6 P7 P8 P9 P10 P11 P12 P13 P14 P15 P16 P17 P18 P19 P20: "Header, 2-Pin, pitch 2.54mm", Solder=WAVE
P21: library part "Header 4x1", "Header, 4 Pin Pitch 2.54mm", MPN=S1012EC-40-ND, CompanyID=VT-00125, Solder=WAVE
R1 R2 R3 R4 R5 R6 R7 R8 R9 R10 R11 R12 R13 R14 R15 R16 R17 R18 R19 R20 R21 R22 R23 R24 R25 R26 R27 R28 R29 R30 R31 R32 R33 R34 R35 R36 R37 R38 R39 R40 R41 R42 R43 R44 R45 R46 R47 R48 R49 R50 R51 R52 R53 R54 R55 R56 R57 R58 R59 R60 R61 R62 R63 R64 R65 R66 R67 R68 R69 R70 R71 R72 R73 R74 R75 R76 R77 R78 R79 R80 R81 R82 R83 R84 R85 R86 R87 R88 R89 R90 R91 R92 R93 R94 R95 R96 R97 R98 R99 R100 R101 R102 R103 R104 R105 R106 R107: library part AC0603FR-0713KL, "RES SMD 13K OHM 1% 1/10W 0603", Category=RESISTOR, CompanyID=VT-00329, MPN=AC0603FR-0713KL, Solder=SMT
S1: library part SWDIP6, "WS-DITV 2.54 mm small compact THT flat actuator with top tape", Manufacturer="Wurth Elektronik", Part No.=418127160906, ComponentLink1 Description=Manufacturer, ComponentLink1URL=http://www.we-online.com, ComponentLink2 Description=Datasheet, ComponentLink2URL=http://katalog.we-online.de/em/datasheet/4181271609xx.pdf, Created by="Baojun Chen", Created Date=Dec.2015, Pole=06
U1 U13: "I/O Expander 16 I²C 1.7MHz 28-SOIC", Package="SOIC-28 Microchip", Availability=Unavailable, MF=Microchip, MP=MCP23017-E/SO, Price=None, SnapEDA_Link=https://www.snapeda.com/parts/MCP23017-E/SO/Microchip/view-part/48467/?ref=snap
U2 U3: "High-Voltage, High-Current Darlington Array", ComponentLink1Description="Manufacturer Link", ComponentLink1URL=http://www.allegromicro.com/, DatasheetVersion=1999, LatestRevisionDate=06-Jun-2005, LatestRevisionNote="Stylized 3D Model Added.", PackageDescription="DIP; 18 Leads; Row Spacing 7.62 mm; Pitch 2.54 mm", PackageReference=A18, PackageVersion=1999, Published=13-Oct-2000, Publisher="Altium Limited"
U4 U5 U6 U7 U8 U9 U10 U11 U14 U15 U16 U17 U18 U19 U20 U21: "OPTOISOLATOR 3.75KV TRANS 4-SOP", CompanyID=VT-xxxx, MPN=VOM617A-2T, Solder=SMT
U?: "SIMPLE SWITCHER Power Converter 150 KHz 3A Step-Down Voltage Regulator", MPN=LM2596SX-ADJ/NOPB, Category=IC, Solder=SMT

## Via types
v1: diameter 1, hole 0.5, Top Layer to Bottom Layer, 42 vias
v2: diameter 1.5, hole 0.5, Top Layer to Bottom Layer, 8 vias

## Nets (pads, with @x,y where several pads share a name; then routed paths per layer and width w, separated by ;. In a path a pad name is that pad's centre, name@x,y a point inside that pad or via, vN(x,y) a via of type N, cw(c..) or ccw(c..) an arc to the next point about the centre after c; other vN are vias at no path point)
A00: R36.2 U1.21 U2.1 | length 37.1
  Top Layer w0.5: U2.1@63.831,60.536 66.572,60.536 R36.2@70.864,56.245 70.864,55.468 71.595,54.737 73.754,54.737 74.135,55.118 74.135,62.484 75.532,63.881 U1.21@89.977,63.881
A0: R98.2 U13.21 U20.4 | length 29.1
  Top Layer w0.5: U13.21@52.324,36.703 52.324,32.131 52.88,31.575 69.39,31.575 70.127,30.838 R98.2@70.127,26.924 70.127,25.083 U20.4@70.443,24.768
A1: R87.2 U13.22 U16.4 | length 53.9
  Top Layer w0.5: U13.22@53.594,36.703 53.594,37.743 52.856,38.481 38.321,38.481 36.678,36.838 36.678,31.353 37.456,30.575 59.087,30.575 60.983,28.679 R87.2@60.983,26.924 60.983,25.11 U16.4@61.325,24.768
A01: R35.2 U1.22 U2.2 | length 50.7
  Top Layer w0.5: R35.2@70.864,58.404 70.386,58.404 66.983,61.806 U2.2@63.831,61.806 62.67,61.806 62.065,61.202 62.065,59.321 67.792,53.594 74.025,53.594 75.135,54.704 75.135,62.07 75.676,62.611 U1.22@89.977,62.611
A2: R73.2 U10.4 U13.23 | length 50
  Top Layer w0.5: U10.4@52.208,24.768 51.839,25.137 R73.2@51.839,26.924 51.839,28.933 51.197,29.575 36.456,29.575 35.678,30.353 35.678,37.252 38.05,39.624 53.127,39.624 54.864,37.887 U13.23@54.864,36.703
A02: R34.2 U1.23 U2.3 | length 53.7
  Top Layer w0.5: R34.2@70.911,60.483 70.2,60.483 67.607,63.076 U2.3@63.831,63.076 62.051,63.076 61.061,62.087 61.061,58.801 61.171,58.801 67.378,52.594 74.439,52.594 76.135,54.29 76.135,61.07 76.406,61.341 U1.23@89.977,61.341
A3: R59.2 U6.4 U13.24 | length 45.5
  Top Layer w0.5: U6.4@43.091,24.768 42.822,25.037 R59.2@42.822,26.924 42.822,27.917 42.164,28.575 35.378,28.575 34.678,29.275 34.678,37.667 37.651,40.64 53.525,40.64 56.134,38.031 U13.24@56.134,36.703
A03: R33.2 U1.24 U2.4 | length 55.9
  Top Layer w0.5: R33.2@70.899,62.722 70.752,62.722 69.127,64.346 U2.4@63.831,64.346 61.907,64.346 60.061,62.501 60.061,58.387 66.854,51.594 74.853,51.594 77.135,53.875 77.135,59.436 77.77,60.071 U1.24@89.977,60.071
A4: R96.2 U13.25 U18.4 | length 41.6
  Top Layer w0.5: U18.4@33.974,24.768 33.678,25.064 R96.2@33.678,26.924 33.678,38.123 37.211,41.656 53.923,41.656 57.404,38.175 U13.25@57.404,36.703
A04: R40.2 U1.25 U2.5 | length 59
  Top Layer w0.5: R40.2@70.74,64.674 R40.2@70.911,64.674 69.968,65.616 U2.5@63.831,65.616 61.424,65.616 59.061,63.254 59.061,57.906 66.373,50.594 75.268,50.594 78.135,53.461 78.135,58.44 78.495,58.801 U1.25@89.977,58.801
A5: R84.2 U13.26 U14.4 | length 56.9
  Top Layer w0.5: v1(24.511,29.337) 24.511,26.947 R84.2@24.534,26.924 24.534,25.073 U14.4@24.839,24.768 ; v1(57.867,32.893) 57.867,32.957 58.674,33.764 U13.26@58.674,36.703
  Bottom Layer w0.5: v1(24.511,29.337) 24.511,37.211 26.575,39.275 57.118,39.275 57.867,38.526 v1(57.867,32.893)
A05: R39.2 U1.26 U2.6 | length 61.2
  Top Layer w0.5: R39.2@70.911,66.833 70.857,66.886 U2.6@63.831,66.886 61.28,66.886 58.061,63.668 58.061,57.491 65.959,49.594 75.682,49.594 79.135,53.047 79.135,57.023 79.643,57.531 U1.26@89.977,57.531
A6: R71.2 U8.4 U13.27 | length 69.5
  Top Layer w0.5: v1(15.367,29.464) 15.367,26.929 R71.2@15.372,26.924 15.372,25.135 U8.4@15.74,24.768 ; v1(59.571,32.893) 59.944,33.266 U13.27@59.944,36.703
  Bottom Layer w0.5: v1(15.367,29.464) 15.367,38.481 17.161,40.275 58.471,40.275 59.571,39.175 v1(59.571,32.893)
A06: R38.2 U1.27 U2.7 | length 64.5
  Top Layer w0.5: R38.2@70.911,68.992 70.075,68.156 U2.7@63.831,68.156 60.908,68.156 57.061,64.31 57.061,57.077 65.545,48.594 76.096,48.594 80.135,52.633 80.135,55.878 80.518,56.261 U1.27@89.977,56.261
A7: R57.2 U4.4 U13.28 | length 76.8
  Top Layer w0.5: v1(6.223,29.464) 6.223,27.019 R57.2@6.318,26.924 6.318,25.073 U4.4@6.623,24.768 ; U13.28@61.214,36.703 61.214,32.953 v1(61.274,32.893)
  Bottom Layer w0.5: v1(6.223,29.464) 6.223,30.988 16.51,41.275 59.436,41.275 61.274,39.437 v1(61.274,32.893)
A07: R37.2 U1.28 U2.8 | length 50.4
  Top Layer w0.5: U2.8@63.831,69.426 69.059,69.426 R37.2@70.911,71.278 70.911,73.07 71.755,73.914 90.424,73.914 91.677,72.661 91.677,55.355 91.313,54.991 U1.28@89.977,54.991
AD00: R53.2 S1.4 U1.15 | length 119.9
  Top Layer w0.5: S1.4@11.608,66.87 15.014,66.87 R53.2@15.098,66.955 ; v1(87.376,71.501) U1.15@89.977,71.501
  Bottom Layer w0.5: S1.4@11.608,66.87 9.203,66.87 8.255,67.818 8.255,77.707 19.464,88.916 85.582,88.916 87.376,87.122 v1(87.376,71.501)
AD0: R50.2 S1.1 U13.15 | length 109.8
  Top Layer w0.5: S1.1@11.608,59.25 14.929,59.25 R50.2@15.098,59.081 ; v1(43.942,32.131) 44.704,32.893 U13.15@44.704,36.703
  Bottom Layer w0.5: S1.1@11.608,59.25 11.608,56.845 13.462,54.991 56.134,54.991 65.532,45.593 65.532,30.05 63.574,28.092 46.711,28.092 43.942,30.861 v1(43.942,32.131)
AD01: R54.2 S1.5 U1.16 | length 114.7
  Top Layer w0.5: S1.5@11.608,69.41 14.929,69.41 R54.2@15.098,69.58 ; v1(87.376,69.977) 87.63,70.231 U1.16@89.977,70.231
  Bottom Layer w0.5: S1.5@11.608,69.41 9.838,69.41 9.255,69.993 9.255,77.293 19.878,87.916 83.915,87.916 86.126,85.705 86.126,70.983 87.132,69.977 v1(87.376,69.977)
AD1: R51.2 S1.2 U13.16 | length 109.2
  Top Layer w0.5: S1.2@11.608,61.79 15.014,61.79 R51.2@15.098,61.706 ; v1(45.72,32.131) 45.974,32.385 U13.16@45.974,36.703
  Bottom Layer w0.5: S1.2@11.608,61.79 10.208,60.39 10.208,56.831 13.048,53.991 55.72,53.991 64.532,45.179 64.532,30.464 63.16,29.092 47.126,29.092 45.72,30.497 v1(45.72,32.131)
AD02: R55.2 S1.6 U1.17 | length 108.2
  Top Layer w0.5: S1.6@11.608,71.95 14.844,71.95 R55.2@15.098,72.204 ; v1(87.376,68.453) 87.62,68.453 88.128,68.961 U1.17@89.977,68.961
  Bottom Layer w0.5: S1.6@11.608,71.95 11.608,78.232 20.293,86.916 83.137,86.916 85.126,84.927 85.126,70.459 87.132,68.453 v1(87.376,68.453)
AD2: R52.2 S1.3 U13.17 | length 109.1
  Top Layer w0.5: S1.3@11.608,64.33 R52.2@15.098,64.33 ; v1(47.244,32.131) U13.17@47.244,36.703
  Bottom Layer w0.5: S1.3@11.608,64.33 11.608,63.19 11.028,63.19 9.208,61.37 9.208,55.562 11.811,52.959 55.338,52.959 63.532,44.765 63.532,30.878 62.745,30.092 47.895,30.092 47.244,30.743 v1(47.244,32.131)
B00: R44.2 U1.1 U3.1 | length 62.3
  Top Layer w0.5: U1.1@99.187,54.991 96.774,54.991 95.377,56.388 95.377,72.263 96.298,73.184 123.158,73.184 123.696,72.646 R44.2@123.696,69.965 130.922,69.965 131.845,69.043 U3.1@131.845,67.156
B0: R100.2 U13.1 U21.4 | length 101
  Top Layer w0.5: U13.1@61.214,45.913 62.058,45.069 140.351,45.069 143.328,42.092 R100.2@143.328,26.924 143.328,24.819 U21.4@143.379,24.768
B1: R89.2 U13.2 U17.4 | length 94.3
  Top Layer w0.5: U13.2@59.944,45.913 59.944,44.577 60.452,44.069 132.842,44.069 134.008,42.903 R89.2@134.008,27.051 134.008,25.022 U17.4@134.262,24.768
B01: R43.2 U1.2 U3.2 | length 70.6
  Top Layer w0.5: U1.2@99.187,56.261 113.284,56.261 113.856,55.689 113.856,53.461 118.195,49.122 133.232,49.122 138.611,54.501 138.611,61.703 134.427,65.886 U3.2@131.845,65.886 130.629,65.886 128.582,67.933 R43.2@123.696,67.933
B2: R75.2 U11.4 U13.3 | length 86.5
  Top Layer w0.5: U13.3@58.674,45.913 58.674,44.323 59.928,43.069 124.444,43.069 124.864,42.649 R75.2@124.864,26.924 124.864,25.048 U11.4@125.145,24.768
B02: R42.2 U1.3 U3.3 | length 67
  Top Layer w0.5: U1.3@99.187,57.531 113.428,57.531 114.856,56.103 114.856,53.875 118.609,50.122 132.818,50.122 137.611,54.915 137.611,61.289 134.283,64.616 U3.3@131.845,64.616 129.794,64.616 128.382,66.028 R42.2@123.696,66.028
B3: R60.2 U7.4 U13.4 | length 77.9
  Top Layer w0.5: U13.4@57.404,45.913 57.404,44.179 59.514,42.069 115.03,42.069 115.57,41.529 115.57,27.074 R60.2@115.72,26.924 115.72,25.075 U7.4@116.028,24.768
B03: R41.2 U1.4 U3.4 | length 63.5
  Top Layer w0.5: U1.4@99.187,58.801 113.572,58.801 115.856,56.517 115.856,54.29 119.024,51.122 132.403,51.122 136.611,55.329 136.611,60.874 134.139,63.346 U3.4@131.845,63.346 128.92,63.346 128.143,64.123 R41.2@123.696,64.123
B4: R97.2 U13.5 U19.4 | length 69.3
  Top Layer w0.5: U13.5@56.134,45.913 56.134,43.688 59.055,40.767 105.283,40.767 106.576,39.474 R97.2@106.576,26.924 106.576,25.102 U19.4@106.911,24.768
B04: R48.2 U1.5 U3.5 | length 59.7
  Top Layer w0.5: U1.5@99.187,60.071 113.717,60.071 116.856,56.932 116.856,54.704 119.438,52.122 131.989,52.122 135.611,55.743 135.611,60.197 133.731,62.076 U3.5@131.845,62.076 123.837,62.076 R48.2@123.696,62.218
B5: R85.2 U13.6 U15.4 | length 61.2
  Top Layer w0.5: U13.6@54.864,45.913 54.864,43.544 58.641,39.767 58.695,39.767 58.711,39.751 96.647,39.751 97.409,38.989 97.409,26.947 R85.2@97.432,26.924 97.432,25.129 U15.4@97.794,24.768
B05: R47.2 U1.6 U3.6 | length 56.2
  Top Layer w0.5: U1.6@99.187,61.341 113.861,61.341 117.856,57.346 117.856,55.322 120.056,53.122 131.575,53.122 134.611,56.158 134.611,59.536 133.341,60.806 U3.6@131.845,60.806 124.062,60.806 R47.2@123.696,60.44
B6: R72.2 U9.4 U13.7 | length 52.7
  Top Layer w0.5: U13.7@53.594,45.913 53.594,43.4 58.259,38.735 87.249,38.735 88.288,37.696 R72.2@88.288,26.924 88.288,25.156 U9.4@88.677,24.768
B06: R46.2 U1.7 U3.7 | length 52.9
  Top Layer w0.5: U1.7@99.187,62.611 114.005,62.611 119.015,57.601 119.015,55.847 120.74,54.122 131.161,54.122 133.611,56.572 133.611,58.948 133.022,59.536 U3.7@131.845,59.536 129.921,59.536 129.159,58.774 123.808,58.774 R46.2@123.696,58.662
B7: R58.2 U5.4 U13.8 | length 162.7
  Top Layer w0.5: U13.8@52.324,45.913 v1(52.324,47.879) ; v1(79.375,29.337) 79.375,27.028 R58.2@79.271,26.924 79.271,25.056 U5.4@79.56,24.768
  Bottom Layer w0.5: v1(52.324,47.879) 52.324,51.181 51.546,51.959 11.192,51.959 9.779,50.546 9.779,38.481 3.556,32.258 3.556,24.511 5.207,22.86 75.301,22.86 79.375,26.934 v1(79.375,29.337)
B07: R45.2 U1.8 U3.8 | length 39.2
  Top Layer w0.5: U1.8@99.187,63.881 114.149,63.881 120.015,58.015 120.015,56.261 121.031,55.245 123.296,55.245 123.696,55.645 R45.2@123.696,56.757 128.556,56.757 130.065,58.266 U3.8@131.845,58.266
GND: C17.2 C18.2 C19.2 C20.2 C21.2 C22.2 C31.2 C32.1 C33.2 D42.2 D43.1 P18.2 P21.2 S1.7 S1.8 S1.9 S1.10 S1.11 S1.12 U1.10 U2.9 U3.9 U4.3 U5.3 U6.3 U7.3 U8.3 U9.3 U10.3 U11.3 U13.10 U14.3 U15.3 U16.3 U17.3 U18.3 U19.3 U20.3 U21.3 U?.3 U?.5 | length 0.7
  Top Layer w0.5: v1@11.173,24.768 v1(11.176,24.765) ; v1@20.203,24.768 v1(20.205,24.765) ; v1@28.939,24.768 v1(28.941,24.765) ; v1@38.169,24.768 v1(38.172,24.765) ; v1@55.995,24.768 v1(55.998,24.765) v1@56.248,24.765 ; v1@75.435,24.768 v1(75.438,24.765) ; v1@83.817,24.768 v1(83.82,24.765) ; v1@101.816,24.768 v1(101.818,24.765) ; v1@111.249,24.768 v1(111.252,24.765) ; v1@120.139,24.768 v1(120.142,24.765) ; v1@129.664,24.768 v1(129.667,24.765) ; U3.9@131.545,56.996 U3.9@131.845,56.996 ; v1@138.554,24.768 v1(138.557,24.765) ; v1@147.688,24.768 v1(147.739,24.819)
  other v1: 161.798,9.652 166.878,20.447 46.99,24.768 65.913,24.765 92.964,24.768 49.784,42.926 129.921,55.372 106.911,66.87
NetC1_2: C1.2 D2.2 K1.5 R1.1 | length 14.5
  Top Layer w0.5: C1.2@6.604,83.18 9.181,83.18 D2.2@9.398,83.397 9.373,83.422 R1.1@9.373,87.757 10.287,87.757 11.43,88.9 11.43,93.011 K1.5@11,93.441
NetC2_2: C2.2 D6.2 K2.5 R3.1 | length 13.8
  Top Layer w0.5: C2.2@50.546,83.119 52.845,83.119 53.295,83.569 R3.1@53.295,87.757 54.102,87.757 54.545,88.2 54.545,93.37 K2.5@54.474,93.441
NetC3_2: C3.2 D7.2 K3.5 R4.1 | length 14.4
  Top Layer w0.5: C3.2@94.107,83.312 96.816,83.312 D7.2@96.901,83.397 96.754,83.545 R4.1@96.754,88.011 97.827,88.011 98.042,88.227 K3.5@98.042,93.695
NetC4_2: C4.2 D8.2 K4.5 R5.1 | length 14.3
  Top Layer w0.5: C4.2@137.541,83.18 140.143,83.18 D8.2@140.36,83.397 140.134,83.623 R5.1@140.134,88.011 140.843,88.011 141.497,88.665 K4.5@141.497,93.695
NetC5_2: C5.2 D10.2 K5.5 R9.1 | length 14.4
  Top Layer w0.5: C5.2@17.399,83.185 20.108,83.185 D10.2@20.32,83.397 20.205,83.512 R9.1@20.205,87.757 21.209,87.757 21.869,88.417 K5.5@21.869,93.441
NetC6_2: C6.2 D14.2 K6.5 R10.1 | length 13.9
  Top Layer w0.5: C6.2@61.468,82.992 63.78,82.992 D14.2@64.186,83.397 64.127,83.456 R10.1@64.127,87.757 64.897,87.757 65.377,88.237 65.377,93.407 K6.5@65.343,93.441
NetC7_2: C7.2 D15.2 K7.5 R11.1 | length 14.5
  Top Layer w0.5: C7.2@105.16,83.119 107.63,83.119 D15.2@107.908,83.397 107.751,83.554 R11.1@107.751,88.011 108.771,88.011 109.152,88.392 109.152,93.472 K7.5@108.93,93.695
NetC8_2: C8.2 D16.2 K8.5 R12.1 | length 14.1
  Top Layer w0.5: C8.2@148.59,83.185 151.172,83.185 D16.2@151.384,83.397 151.384,87.773 R12.1@151.146,88.011 151.638,88.011 152.472,88.845 K8.5@152.472,93.695
NetC9_2: C9.2 D18.2 K9.5 R17.1 | length 14.3
  Top Layer w0.5: C9.2@28.194,83.119 30.71,83.119 D18.2@30.988,83.397 30.988,87.708 R17.1@31.037,87.757 32.131,87.757 32.737,88.363 K9.5@32.737,93.441
NetC10_2: C10.2 D23.2 K10.5 R19.1 | length 14.5
  Top Layer w0.5: C10.2@115.57,83.058 118.152,83.058 D23.2@118.491,83.397 118.397,83.492 R19.1@118.397,88.011 119.303,88.011 119.647,88.355 119.647,93.66 K10.5@119.612,93.695
NetC11_2: C11.2 D24.2 K11.5 R20.1 | length 14.6
  Top Layer w0.5: C11.2@159.004,83.058 161.662,83.058 D24.2@162.001,83.397 161.761,83.637 R20.1@161.761,88.011 162.525,88.011 163.16,88.646 K11.5@163.16,93.695